# EAGLE board mk_bt (EAGLE 6.0)
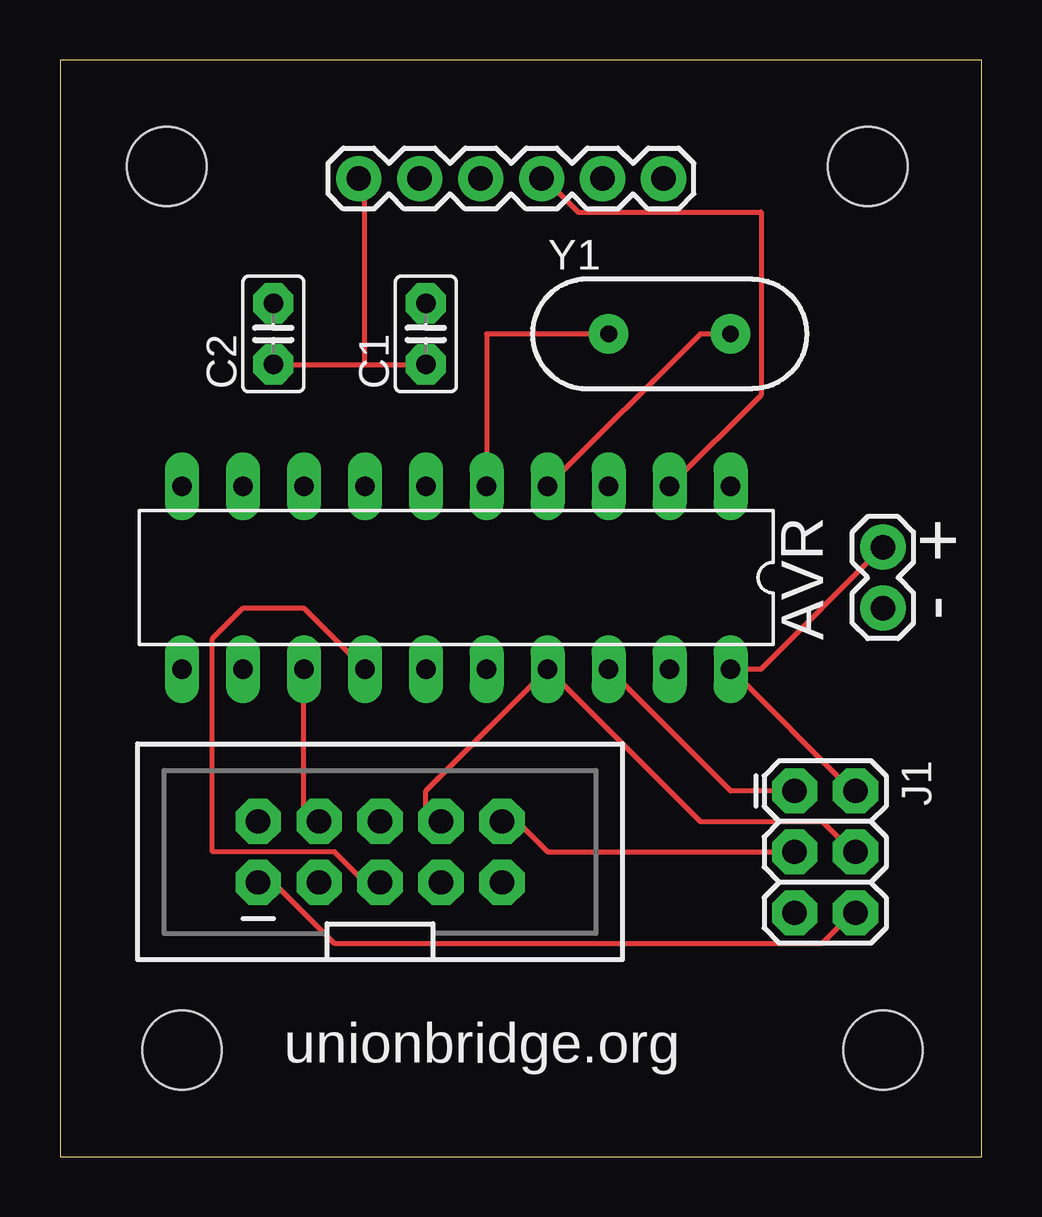
[diagram p0: board, top side]
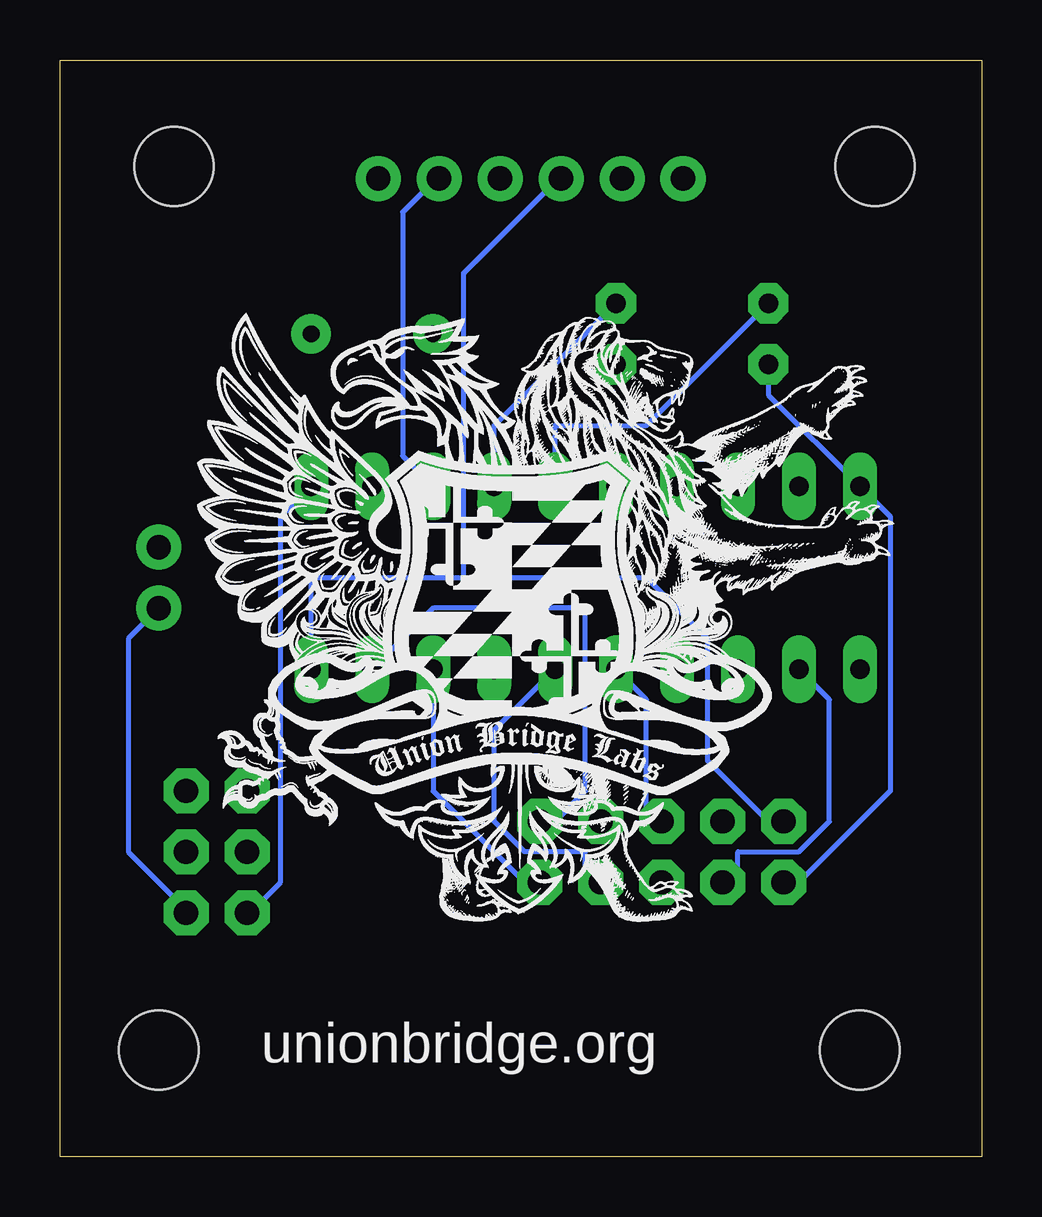
[diagram p1: board, bottom side, seen from below]

Size 38.41 x 45.71 mm. Coordinates in mm from the lower left corner, seen from the top.
Outline: 0,0 38.4,0 38.4,45.71 0,45.71 0,0
Copper layers (1*16): Top 0.035mm / dielectric 1.5mm / Bottom 0.035mm
Design rules: minimum track width 8mil, minimum drill 20mil, track to track 8mil, track to pad 8mil, pad to pad 8mil, via to via 8mil, smd to smd 8mil, copper to edge 10mil, drill to drill 8mil, minimum pad ring 12mil, minimum via ring 10mil, stop-mask expansion 4mil, vias tented up to drill 25mil, thermal gap 10mil

## Footprints (pad centres in the part's own frame; a part is rotated, then mirrored left to right if it is on the bottom)
DIL20 = drill 0.813 long: 1 -11.43,-3.81; 2 -8.89,-3.81; 3 -6.35,-3.81; 4 -3.81,-3.81; 5 -1.27,-3.81; 6 1.27,-3.81; 7 3.81,-3.81; 8 6.35,-3.81; 9 8.89,-3.81; 10 11.43,-3.81; 11 11.43,3.81; 12 8.89,3.81; 13 6.35,3.81; 14 3.81,3.81; 15 1.27,3.81; 16 -1.27,3.81; 17 -3.81,3.81; 18 -6.35,3.81; 19 -8.89,3.81; 20 -11.43,3.81
C025-025X050 = drill 0.813 pad 1.676 octagon: 1 -1.27,0; 2 1.27,0
2X3 = drill 1.016 pad 1.88 octagon: 1 0,0; 2 0,2.54; 3 2.54,0; 4 2.54,2.54; 5 5.08,0; 6 5.08,2.54
FTDI_BASIC = drill 1.016 pad 1.88: CTS 10.16,0; DTR 0,0; GND 12.7,0; RXI 2.54,0; TXO 5.08,0; VCC 7.62,0
2X5-SHROUDED = drill 1.016 pad 1.88 octagon: 1 -1.27,5.08; 2 1.27,5.08; 3 -1.27,2.54; 4 1.27,2.54; 5 -1.27,0; 6 1.27,0; 7 -1.27,-2.54; 8 1.27,-2.54; 9 -1.27,-5.08; 10 1.27,-5.08
1X02 = drill 1.016 pad 1.88: 1 0,0; 2 2.54,0
STAND-OFF = hole 3.302: 0,0
HC49US = drill 0.7 pad 1.651: 1 -2.54,0; 2 2.54,0

## Placement (x,y rotation side)
AVR  TINY2313  [DIL20]  16.51,24.13 180 top
C1  22pf  [C025-025X050]  15.24,34.29 90 top
C2  22pf  [C025-025X050]  8.89,34.29 90 top
J1  SPI  [2X3]  30.61,15.24 270 top
JP1  BLUETOOTH  [FTDI_BASIC]  25.15,40.77 180 top
JP2  MONOME  [2X5-SHROUDED]  13.34,12.7 90 top
JP3  [1X02]  34.29,25.4 270 top
U$1  [STAND-OFF]  5.08,4.44 0 top
U$2  [STAND-OFF]  33.66,41.28 0 top
U$3  [STAND-OFF]  4.44,41.28 0 top
U$4  [STAND-OFF]  34.29,4.44 0 top
Y1  16MHz  [HC49US]  25.4,34.29 0 top

## Library data of the parts
AVR = avr-7
C1 C2 = adafruit
J1 JP1-JP3 U$1-U$4 Y1 = SparkFun

## Nets
B0: AVR.12 JP2.3
B1: AVR.13 JP2.4
B2: AVR.14 JP2.5
B3: AVR.15 JP2.6
B4: AVR.16 JP2.7
B5: AVR.17 J1.4 JP2.8
B6: AVR.18 J1.1 JP2.9
B7: AVR.19 J1.3 JP2.10
GND: AVR.10 C1.1 C2.1 J1.6 JP1.GND JP2.1 JP3.2
N$1: AVR.5 C2.2 Y1.1
N$2: AVR.4 C1.2 Y1.2
RESET: AVR.1 J1.5
RX: AVR.2 JP1.TXO
TX: AVR.3 JP1.RXI
VCC: AVR.20 J1.2 JP1.VCC JP2.2 JP3.1

## Tracks (layer width: path | path; a pad name or v marks a point on that pad's centre or on a via)
B0
  Bottom 0.203: AVR.12 6.35,19.05 6.35,13.97 7.62,12.7 10.16,12.7 10.16,11.43 JP2.3
B1
  Top 0.203: AVR.13 10.16,13.97 JP2.4
B2
  Top 0.203: AVR.14 10.16,22.86 7.62,22.86 6.35,21.59 6.35,12.7 11.43,12.7 12.7,11.43 JP2.5
B3
  Bottom 0.203: AVR.15 13.97,19.05 13.97,13.97 JP2.6
B4
  Bottom 0.203: AVR.16 20.32,17.78 20.32,13.97 19.05,12.7 16.51,12.7 16.51,11.43 JP2.7
B5
  Top 0.203: JP2.8 15.24,13.97 15.24,15.24 AVR.17 26.67,13.97 31.75,13.97 33.02,12.7 J1.4
B6
  Top 0.203: AVR.18 27.94,15.24 J1.1
  Bottom 0.203: AVR.18 22.86,15.24 19.05,11.43 JP2.9
B7
  Top 0.203: J1.3 20.32,12.7 19.05,13.97 JP2.10
  Bottom 0.203: AVR.19 22.86,22.86 16.51,22.86 16.51,15.24 17.78,13.97 JP2.10
GND
  Top 0.203: C2.1 12.7,33.02 | 12.7,33.02 C1.1 | 12.7,33.02 12.7,40.64 JP1.GND | J1.6 33.02,10.16 31.75,8.89 11.43,8.89 8.89,11.43 JP2.1
  Bottom 0.203: JP3.2 35.56,21.59 35.56,12.7 33.02,10.16 J1.6 | C2.1 8.89,31.75 AVR.10 3.81,26.67 3.81,15.24 7.62,11.43 JP2.1
N$1
  Top 0.203: AVR.5 17.78,34.29 Y1.1
  Bottom 0.203: C2.2 13.97,30.48 17.78,30.48 AVR.5
N$2
  Top 0.203: AVR.4 26.67,34.29 Y1.2
  Bottom 0.203: C1.2 20.32,30.48 AVR.4
RESET
  Bottom 0.203: AVR.1 29.21,26.67 29.21,11.43 30.48,10.16 J1.5
RX
  Top 0.203: AVR.2 29.21,31.75 29.21,39.37 21.59,39.37 20.32,40.64 JP1.TXO
TX
  Bottom 0.203: AVR.3 24.13,29.21 24.13,39.37 22.86,40.64 JP1.RXI
VCC
  Top 0.203: J1.2 33.02,15.24 AVR.20 29.21,20.32 JP3.1
  Bottom 0.203: 21.59,24.13 27.94,24.13 AVR.20 | 21.59,24.13 13.97,24.13 11.43,21.59 11.43,16.51 8.89,13.97 JP2.2 | 21.59,24.13 21.59,36.83 17.78,40.64 JP1.VCC

## Text on the board
tPlace: + | - | unionbridge.org
bPlace: unionbridge.org